# EAGLE board Meshtastic-DIY_v1.02 (EAGLE 9.6.2)
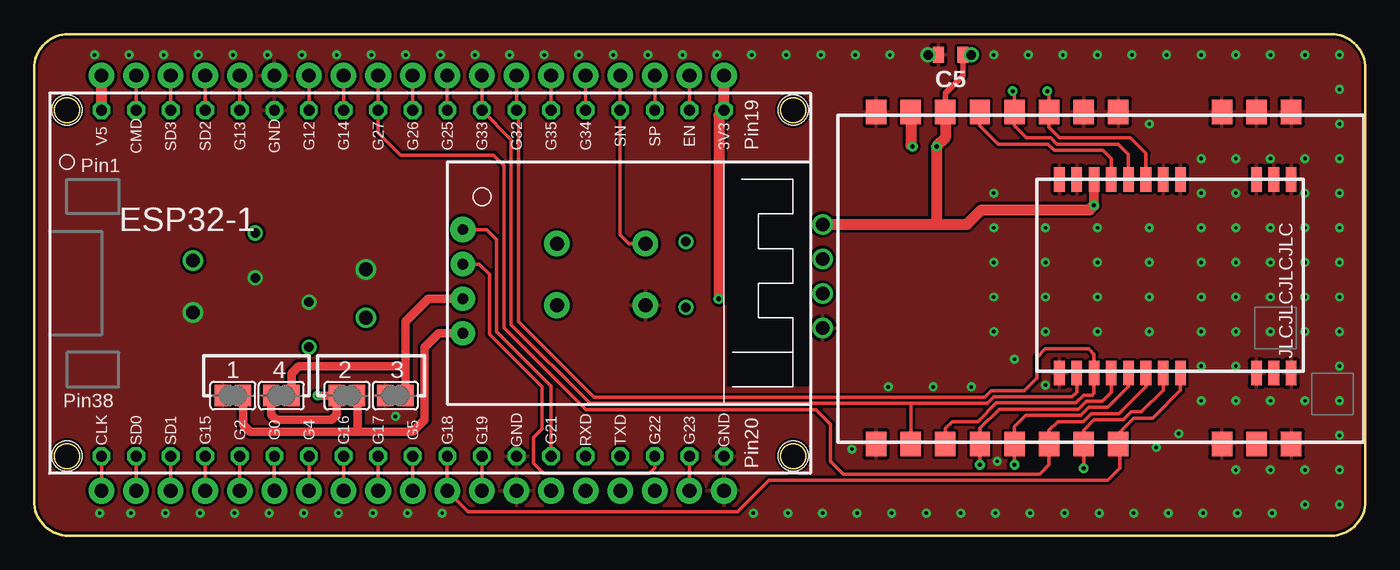
[diagram p0: board, top side]
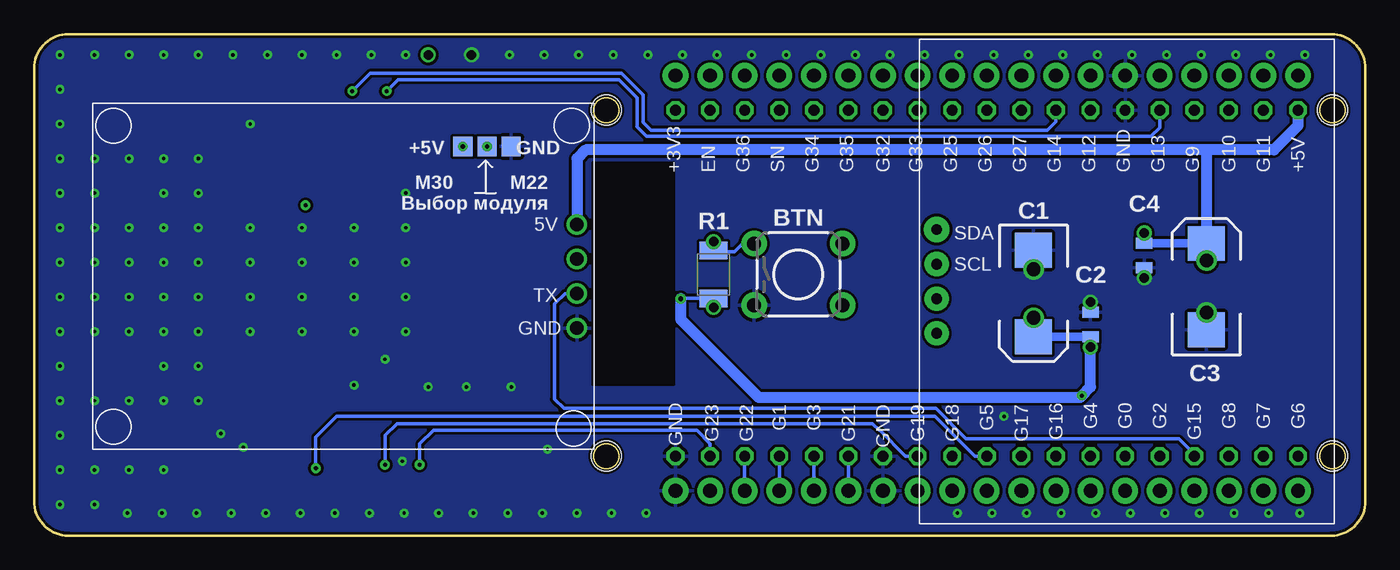
[diagram p1: board, bottom side, seen from below]

Size 97.79 x 36.83 mm. Coordinates in mm from the lower left corner, seen from the top.
Outline: 2.54,36.83 95.25,36.83 arc-90 97.79,34.29 97.79,2.54 arc-90 95.25,0 2.54,0 arc-90 0,2.54 0,34.29 arc-90 2.54,36.83
Copper layers (1*16): Top 0.035mm / dielectric 1.5mm / Bottom 0.035mm
Design rules "default *": minimum track width 0.2mm, minimum drill 0.25mm, track to track 0.2mm, track to pad 0.2mm, pad to pad 0.2mm, via to via 0.2mm, smd to smd 6mil, copper to edge 0.2mm, drill to drill 0.2mm, minimum pad ring 10mil, minimum via ring 8mil, stop-mask expansion 4mil, vias tented up to drill 0.35mm, thermal gap 10mil
Holes 2.2 mm at 2.41,31.24 2.41,5.84 55.75,5.84 55.75,31.24
tRestrict: area 50.9,11 to 56.9,27.4
bRestrict: area 50.8,11 to 56.8,27.4

## Footprints (pad centres in the part's own frame; a part is rotated, then mirrored left to right if it is on the bottom)
SJ = smd 1.168 x 1.6: 1 -0.762,0; 2 0.762,0
TACTILE_SWITCH_PTH_6.0MM = drill 1.016 pad 1.88: 1 -3.251,2.261; 2 3.251,2.261; 3 -3.251,-2.261; 4 3.251,-2.261
EIA7343 = smd 2.55 x 2.7: A 3.17,0; C -3.17,0
0805 = smd 0.8 x 1.2: 1 -0.9,0; 2 0.9,0
NODEMCU_ESP32_WROOM_32--38PINS = drill 0.8 octagon: 1 -13.97,-27.94; 2 -13.97,-25.4; 3 -13.97,-22.86; 4 -13.97,-20.32; 5 -13.97,-17.78; 6 -13.97,-15.24; 7 -13.97,-12.7; 8 -13.97,-10.16; 9 -13.97,-7.62; 10 -13.97,-5.08; 11 -13.97,-2.54; 12 -13.97,0; 13 -13.97,2.54; 14 -13.97,5.08; 15 -13.97,7.62; 16 -13.97,10.16; 17 -13.97,12.7; 18 -13.97,15.24; 19 -13.97,17.78; 20 11.43,17.78; 21 11.43,15.24; 22 11.43,12.7; 23 11.43,10.16; 24 11.43,7.62; 25 11.43,5.08; 26 11.43,2.54; 27 11.43,0; 28 11.43,-2.54; 29 11.43,-5.08; 30 11.43,-7.62; 31 11.43,-10.16; 32 11.43,-12.7; 33 11.43,-15.24; 34 11.43,-17.78; 35 11.43,-20.32; 36 11.43,-22.86; 37 11.43,-25.4; 38 11.43,-27.94
1X19_NO_SILK = drill 1.016 pad 1.88: 1 0,0; 2 2.54,0; 3 5.08,0; 4 7.62,0; 5 10.16,0; 6 12.7,0; 7 15.24,0; 8 17.78,0; 9 20.32,0; 10 22.86,0; 11 25.4,0; 12 27.94,0; 13 30.48,0; 14 33.02,0; 15 35.56,0; 16 38.1,0; 17 40.64,0; 18 43.18,0; 19 45.72,0
1210 = smd 1.27 x 2.06: 1 -1.755,0; 2 1.755,0
TP14SQ = smd 1.4 x 1.4: TP 0,0
E22-XXXM30S = smd 1.8 x 1.5: P$1 -11.938,15.24; P$2 -11.938,12.7; P$3 -11.938,10.16; P$4 -11.938,2.54; P$5 -11.938,0; P$6 -11.938,-2.54; P$7 -11.938,-5.08; P$8 -11.938,-7.62; P$9 -11.938,-10.16; P$10 -11.938,-12.7; P$11 -11.938,-15.24; P$12 12.446,-15.24; P$13 12.446,-12.7; P$14 12.446,-10.16; P$15 12.446,-7.62; P$16 12.446,-5.08; P$17 12.446,-2.54; P$18 12.446,0; P$19 12.446,2.54; P$20 12.446,10.16; P$21 12.446,12.7; P$22 12.446,15.24
1.3"OLED = drill 0.8 pad 1.778: GND 2.54,0; SCL 5.08,0; VCC 0,0 | drill 0.8 pad 1.9: SDA 7.62,0
E22-XXXM22S = smd 1.8 x 0.78: P$1 -6.858,8.763; P$2 -6.858,7.493; P$3 -6.858,6.223; P$4 -6.858,0.635; P$5 -6.858,-0.635; P$6 -6.858,-1.905; P$7 -6.858,-3.175; P$8 -6.858,-4.445; P$9 -6.858,-5.715; P$10 -6.858,-6.985; P$11 -6.858,-8.255; P$12 7.366,-8.255; P$13 7.366,-6.985; P$14 7.366,-5.715; P$15 7.366,-4.445; P$16 7.366,-3.175; P$17 7.366,-1.905; P$18 7.366,-0.635; P$19 7.366,0.635; P$20 7.366,6.223; P$21 7.366,7.493; P$22 7.366,8.763
GPS-NEO = drill 1: P$1 -3.81,16.51; P$2 -1.27,16.51; P$3 1.27,16.51; P$4 3.81,16.51

## Placement (x,y rotation side)
1  [SJ]  14.61,10.29 0 top
2  [SJ]  22.99,10.29 0 top
3  [SJ]  26.54,10.29 0 top
4  [SJ]  18.16,10.29 0 top
BTN  MOMENTARY-SWITCH-SPST-PTH-6.0MM  [TACTILE_SWITCH_PTH_6.0MM]  41.66,19.18 0 bottom
C1  100uF  [EIA7343]  24.38,17.78 270 bottom
C2  100nF  [0805]  20.19,15.49 90 bottom
C3  100uF  [EIA7343]  11.68,18.29 90 bottom
C4  100nF  [0805]  16.26,20.57 270 bottom
C5  100nF  [0805]  67.31,35.31 180 top
ESP32-1  [NODEMCU_ESP32_WROOM_32--38PINS]  32.89,17.27 270 top
J1  [1X19_NO_SILK]  4.95,33.78 0 top
J2  [1X19_NO_SILK]  4.95,3.3 0 top
R1  10k  [1210]  47.88,19.18 90 bottom
TP1  TPTP14SQ  [TP14SQ]  66.29,28.57 0 bottom
TP2  TPTP14SQ  [TP14SQ]  64.52,28.57 0 bottom
TP3  TPTP14SQ  [TP14SQ]  62.74,28.57 0 bottom
U1  E22-XXXM30S  [E22-XXXM30S]  77.09,19.18 270 top
U$1  13"OLED13"OLED  [1.3"OLED]  31.5,14.86 90 bottom
U$2  E22-XXXM22S  [E22-XXXM22S]  83.57,19.3 270 top
U$3  GPS-NEO  [GPS-NEO]  74.42,19.05 270 bottom

## Library data of the parts
1-4 = jumper
BTN = SparkFun-Switches; PROD_ID: SWCH-08441; SF_SKU: COM-00097
C1 C3 = SparkFun-Capacitors; PROD_ID: CAP-07890
C2 C4 C5 = SparkFun-Capacitors; PROD_ID: CAP-08469
ESP32-1 = ESP32 NODEMCU WROOM 32; ESP: ESP32 WROOM 32
J1 J2 = SparkFun-SEWPAD16
R1 = SparkFun-Resistors; PROD_ID: RES-12374
TP1-TP3 = testpad
U1 U$2 = E22-XXXMXXS
U$1 U$3 = 13oled

## Nets
+3V3: 2.1 4.1 C1.A C2.1 ESP32-1.19 J1.19 R1.1
+5V: C3.A C4.1 C5.1 ESP32-1.1 J1.1 TP1.TP U1.P$9 U$2.P$9 U$3.P$1
BTN: BTN.1 ESP32-1.16 J1.16 R1.2
BUSY: ESP32-1.13 J1.13 U1.P$14 U$2.P$14
DIO0: ESP32-1.10 J1.10
EN: ESP32-1.18 J1.18
G0: ESP32-1.33 J2.6
G1: ESP32-1.23 J2.16
G2: ESP32-1.34 J2.5
G3: ESP32-1.24 J2.15
G4: ESP32-1.32 J2.7
G6: ESP32-1.38 J2.1
G7: ESP32-1.37 J2.2
G8: ESP32-1.36 J2.3
G9: ESP32-1.4 J1.4
G10: ESP32-1.3 J1.3
G11: ESP32-1.2 J1.2
G12: ESP32-1.7 J1.7
G16: ESP32-1.31 J2.8
G17: ESP32-1.30 J2.9
G25: ESP32-1.11 J1.11
G34: ESP32-1.15 J1.15
G35: ESP32-1.14 J1.14
G36: ESP32-1.17 J1.17
GND: 1.1 3.1 BTN.3 C1.C C2.2 C3.C C4.2 C5.2 ESP32-1.6 ESP32-1.20 ESP32-1.26 J1.6 J2.13 J2.19 TP3.TP U1.P$1 U1.P$2 U1.P$3 U1.P$4 U1.P$5 U1.P$11 U1.P$12 U1.P$20 U1.P$22 U$2.P$1 U$2.P$2 U$2.P$3 U$2.P$4 U$2.P$5 U$2.P$10 U$2.P$11 U$2.P$12 U$2.P$20 U$2.P$22 U$3.P$4
GPS_TX: ESP32-1.35 J2.4 U$3.P$3
IRQ: ESP32-1.12 J1.12 U1.P$13 U$2.P$13
LCD_SCK: ESP32-1.22 J2.17 U$1.SCL
LCD_SDA: ESP32-1.25 J2.14 U$1.SDA
MISO: ESP32-1.27 J2.12 U1.P$16 U$2.P$16
MOSI: ESP32-1.9 J1.9 U1.P$17 U$2.P$17
N$1: 3.2 4.2 U$1.GND
N$3: U$3.P$2
N$4: 1.2 2.2 U$1.VCC
N$9: U1.P$8 U$2.P$8
NSS: ESP32-1.28 J2.11 U1.P$19 U$2.P$19
RST: ESP32-1.21 J2.18 U1.P$15 U$2.P$15
RXEN: ESP32-1.8 J1.8 U1.P$6 U$2.P$6
SCK: ESP32-1.29 J2.10 U1.P$18 U$2.P$18
TXEN: ESP32-1.5 J1.5 U1.P$7 U$2.P$7
VCC2: TP2.TP U1.P$10

## Tracks (layer width: path | path; a pad name or v marks a point on that pad's centre or on a via)
+3V3  (via drill 0.3, 0.35, 0.7, 1)
  Top 0.61: 4.1 17.4,8.89 17.78,8.51 21.84,8.51 22.23,8.89 2.1 v20.83,10.29
  Top 0.813: v50.29,17.4 50.29,30.86 ESP32-1.19 J1.19
  Bottom 0.2: R1.1 v47.88,16.76 | v20.19,13.84 20.19,14.35 C2.1
  Bottom 0.254: R1.1 50.27,17.42 v50.29,17.4
  Bottom 0.61: C2.1 24.39,14.59 24.77,14.22 24.77,14.23 C1.A
  Bottom 0.813: v50.29,17.4 50.29,15.88 44.58,10.16 20.95,10.16 v20.83,10.29 20.19,10.92 20.19,14.35 | v24.38,16 C1.A 24.39,14.59
+5V  (via drill 0.3, 0.7, 1)
  Top 0.2: C5.1 v68.83,35.31
  Top 0.406: U1.P$9 66.93,32.5 68.21,33.78 C5.1
  Top 0.7: U$2.P$9 v77.85,24.26
  Top 0.813: U1.P$9 66.93,29.21 TP1.TP 66.29,22.86 | U$3.P$1 66.29,22.86 | 66.29,22.86 68.53,22.86 69.59,23.92 77.52,23.92 v77.85,24.26 | ESP32-1.1 J1.1
  Bottom 0.2: v16.26,22.23 C4.1
  Bottom 0.406: v11.68,20.19 C3.A
  Bottom 0.61: U$3.P$1 | C3.A 16.24,21.46 C4.1
  Bottom 0.813: ESP32-1.1 4.95,30.1 6.73,28.32 11.68,28.32 | 11.68,28.32 C3.A | 11.68,28.32 57.28,28.32 57.91,27.69 U$3.P$1
  other vias: 66.29,28.57
BTN  (via drill 0.7)
  Top 0.254: BTN.1 43.71,21.44 43.05,22.1 ESP32-1.16 J1.16
  Bottom 0.2: R1.2 v47.88,21.59
  Bottom 0.254: BTN.1 45.74,21.44 46.35,20.83 47.77,20.83 R1.2
BUSY
  Top 0.254: U1.P$14 66.93,7.87 67.44,8.38 69.33,8.38 70.7,9.74 76.52,9.74 77.1,10.32 77.72,10.32 77.85,10.45 U$2.P$14 77.85,13.34 77.47,13.72 74.3,13.72 73.66,13.08 73.66,11.56 72.75,10.65 70.32,10.65 69.83,10.16 41.15,10.16 35.59,15.72 35.59,31.09 ESP32-1.13 J1.13
DIO0
  Top 0.254: J1.10 ESP32-1.10
EN
  Top 0.254: J1.18 ESP32-1.18
G0
  Top 0.254: ESP32-1.33 J2.6
G1
  Bottom 0.254: ESP32-1.23 J2.16
G2
  Top 0.254: ESP32-1.34 J2.5
G3
  Bottom 0.254: ESP32-1.24 J2.15
G4
  Top 0.254: ESP32-1.32 J2.7
G6
  Top 0.254: J2.1 ESP32-1.38
G7
  Top 0.254: ESP32-1.37 J2.2
G8
  Top 0.254: ESP32-1.36 J2.3
G9
  Top 0.254: J1.4 ESP32-1.4
G10
  Top 0.254: J1.3 ESP32-1.3
G11
  Top 0.254: J1.2 ESP32-1.2
G12
  Top 0.254: J1.7 ESP32-1.7
G16
  Top 0.254: ESP32-1.31 J2.8
G17
  Top 0.254: ESP32-1.30 J2.9
G25
  Top 0.254: J1.11 ESP32-1.11
G34
  Top 0.254: J1.15 ESP32-1.15
G35
  Top 0.254: J1.14 ESP32-1.14
G36
  Top 0.254: J1.17 ESP32-1.17
GND  (via drill 0.25, 0.7, 1)
  Top 0.2: v65.66,35.31 C5.2
  Bottom 0.2: C1.C v24.38,19.56 | C4.2 v16.26,18.92 | v20.19,17.14 C2.2
  other vias: 74.3,11.05 70.74,5.46 68.83,10.92 66.04,10.92 62.74,10.92 72.01,12.95 84.07,7.49 82.42,6.48 90.81,17.53 93.34,17.53 95.89,17.53 88.27,17.53 85.72,17.53 81.92,17.53 81.92,14.99 85.72,14.99 88.27,14.99 90.81,14.99 93.34,14.99 95.89,14.99 95.89,12.45 88.27,12.45 85.72,12.45 88.27,9.91 90.81,9.91 93.34,9.91 95.89,9.91 81.92,20.07 81.92,22.61 85.72,22.61 88.27,22.61 90.81,22.61 93.34,22.61 95.89,22.61 85.72,20.07 88.27,20.07 90.81,20.07 93.34,20.07 95.89,20.07 85.72,25.15 88.27,25.15 85.72,27.69 88.27,27.69 90.81,27.69 93.34,27.69 95.89,27.69 95.89,25.15 93.34,25.15 60.07,6.35 88.27,4.83 90.81,4.83 93.34,4.83 95.89,4.83 95.89,7.37 95.89,2.29 93.34,2.29 90.93,1.65 88.39,1.65 85.85,1.65 83.31,1.65 80.77,1.65 78.23,1.65 75.69,1.65 73.15,1.65 70.61,1.65 68.07,1.65 65.53,1.65 62.99,1.65 60.45,1.65 57.91,1.65 55.37,1.65 52.83,1.65 29.97,1.65 27.43,1.65 24.89,1.65 22.35,1.65 19.81,1.65 17.27,1.65 14.73,1.65 12.19,1.65 9.65,1.65 7.11,1.65 4.83,1.65 95.89,30.23 95.89,32.77 95.89,35.31 93.34,35.31 90.81,35.31 88.27,35.31 85.72,35.31 83.19,35.31 80.64,35.31 78.11,35.31 75.56,35.31 73.03,35.31 70.48,35.31 62.87,35.31 60.33,35.31 57.78,35.31 55.24,35.31 52.7,35.31 50.16,35.31 47.62,35.31 45.09,35.31 42.55,35.31 40.01,35.31 37.47,35.31 34.92,35.31 32.38,35.31 29.84,35.31 27.3,35.31 24.77,35.31 22.23,35.31 19.68,35.31 17.14,35.31 14.61,35.31 12.06,35.31 9.53,35.31 6.99,35.31 4.45,35.31 78.11,14.99 74.3,14.99 70.48,14.99 78.11,17.53 74.3,17.53 70.48,17.53 78.11,20.07 74.3,20.07 78.11,22.61 85.72,9.91 81.92,30.23 74.3,22.61 70.48,22.61 70.48,20.07 70.48,25.15 11.68,16.38 26.54,8.76
  pour Top: -0.38,36.96 -0.38,-0.38 98.04,-0.38 98.04,36.96
  pour Bottom: -0.13,37.08 -0.13,-0.64 98.3,-0.64 98.3,37.08
GPS_TX
  Top 0.254: ESP32-1.35 J2.4
  Bottom 0.2: ESP32-1.35 12.57,5.97
  Bottom 0.254: U$3.P$3 58.8,17.78 59.56,17.02 59.56,10.03 58.87,9.34 31.56,9.34 29.33,7.11 13.72,7.11 12.57,5.97
IRQ
  Top 0.254: U$2.P$13 76.58,10.54 76.24,10.2 70.51,10.2 70.02,9.71 64.39,9.71 | 64.39,9.71 40.84,9.71 35.05,15.49 35.05,29.08 ESP32-1.12 J1.12 | U1.P$13 64.39,9.71
LCD_SCK
  Top 0.254: U$1.SCL 32.69,19.94 33.45,19.18 33.45,14.8 37.31,10.94 37.31,7.85 36.7,7.24 36.7,5.33 37.44,4.6 45.21,4.6 45.59,4.98 ESP32-1.22
  Bottom 0.254: ESP32-1.22 J2.17
LCD_SDA
  Top 0.254: U$1.SDA 33.22,22.48 33.98,21.72 33.98,14.97 37.97,10.98 ESP32-1.25
  Bottom 0.254: ESP32-1.25 J2.14
MISO  (via drill 0.3)
  Top 0.254: U$2.P$16 80.39,10.94 78.86,9.42 77.47,9.42 76.89,8.84 72.84,8.84 72.01,8 U1.P$16 v72.01,5.21 | ESP32-1.27 J2.12
  Bottom 0.254: ESP32-1.27 33.78,5.84 35.67,7.73 35.69,7.73 36.2,8.24 71.14,8.24 72.01,7.37 v72.01,5.21
MOSI
  Top 0.254: U$2.P$17 81.66,10.94 79.69,8.96 77.66,8.96 77.08,8.38 75.18,8.38 74.55,7.75 U1.P$17 74.55,5.21 73.87,4.53 59.44,4.53 58.5,5.46 58.5,8.17 57.43,9.25 40.54,9.25 34.52,15.27 34.52,27.18 33.76,27.94 26.92,27.94 25.27,29.59 ESP32-1.9 J1.9
N$1
  Top 0.61: 3.2 27.43,10.16 | 4.2 18.92,11.94 19.43,12.45 27.3,12.45 3.2 | U$1.GND 28.96,17.4 27.3,15.75 3.2
N$4
  Top 0.61: 1.2 15.37,8.13 15.88,7.62 23.75,7.62 | U$1.VCC 29.72,14.86 28.7,13.84 28.7,8.51 27.81,7.62 23.75,7.62 | 2.2 23.75,7.62
N$9
  Top 0.254: U$2.P$8 79.12,27.67 78.49,28.3 74.94,28.3 74.48,28.76 70.81,28.76 69.47,30.1 U1.P$8
NSS
  Top 0.254: U$2.P$19 84.2,10.67 82.17,8.64 80.77,8.64 79.63,7.49 U1.P$19 79.76,6.6 79.76,4.95 78.88,4.07 53.98,4.07 51.67,1.76 31.9,1.76 J2.11 ESP32-1.28
RST  (via drill 0.3)
  Top 0.254: U$2.P$15 79.12,10.54 78.45,9.87 77.29,9.87 76.71,9.29 70.89,9.29 69.47,7.87 U1.P$15 v69.47,5.21 | ESP32-1.21 J2.18
  Bottom 0.254: ESP32-1.21 48.13,6.77 49.11,7.75 68.45,7.75 U1.P$15 v69.47,5.21
RXEN  (via drill 0.3)
  Top 0.254: U$2.P$6 81.66,28.07 80.52,29.21 75.31,29.21 74.55,29.97 U1.P$6 74.55,32.51 v74.42,32.64 | J1.8 ESP32-1.8
  Bottom 0.254: ESP32-1.8 22.73,30.4 23.37,29.76 52.47,29.76 53.06,30.35 53.06,32.36 54.64,33.94 73.12,33.94 v74.42,32.64
SCK  (via drill 0.3)
  Top 0.254: U$2.P$18 82.93,10.68 81.35,9.09 80.58,9.09 80,8.51 77.85,8.51 77.09,7.75 U1.P$18 v77.09,4.95 | ESP32-1.29 J2.10
  Bottom 0.254: ESP32-1.29 28.7,5.84 31.62,8.76 75.56,8.76 77.09,7.24 v77.09,4.95
TXEN  (via drill 0.3)
  Top 0.254: U$2.P$7 80.39,27.99 79.63,28.76 75.12,28.76 74.67,29.21 72.9,29.21 72.01,30.1 U1.P$7 72.01,32.51 v71.88,32.64 | J1.5 ESP32-1.5
  Bottom 0.254: ESP32-1.5 15.11,29.94 15.75,29.31 52.8,29.31 53.51,30.02 53.51,32.17 54.82,33.48 71.04,33.48 v71.88,32.64
VCC2  (via drill 0.3)
  Top 0.813: U1.P$10 64.39,28.7 TP2.TP
  other vias: 64.52,28.57

## Text on the board
tNames: JLCJLCJLCJLC
bNames: GND | +5V | +5V | G11 | G10 | G9 | G13 | GND | G12 | G14 | G27 | G26 | G25 | G33 | G32 | G35 | G34 | SN | G36 | EN | +3V3 | M22 | M30 | Выбор модуля | 5V | SDA | SCL | TX | GND | G6 | G7 | G8 | G15 | G2 | G0 | G4 | G16 | G17 | G5 | G18 | G19 | GND | G21 | G3 | G1 | G22 | G23 | GND